# Altium PCB uku207_220_2.PcbDoc (part 2 of 4)
Units mm, origin at the board's own origin, x right, y up, seen from the top; angles counter-clockwise.
Board outline 334.15 x 155.4 mm, 2 copper layers (Top Layer, Bottom Layer); 372 components, 588 nets, 1281 pads, 677 vias.
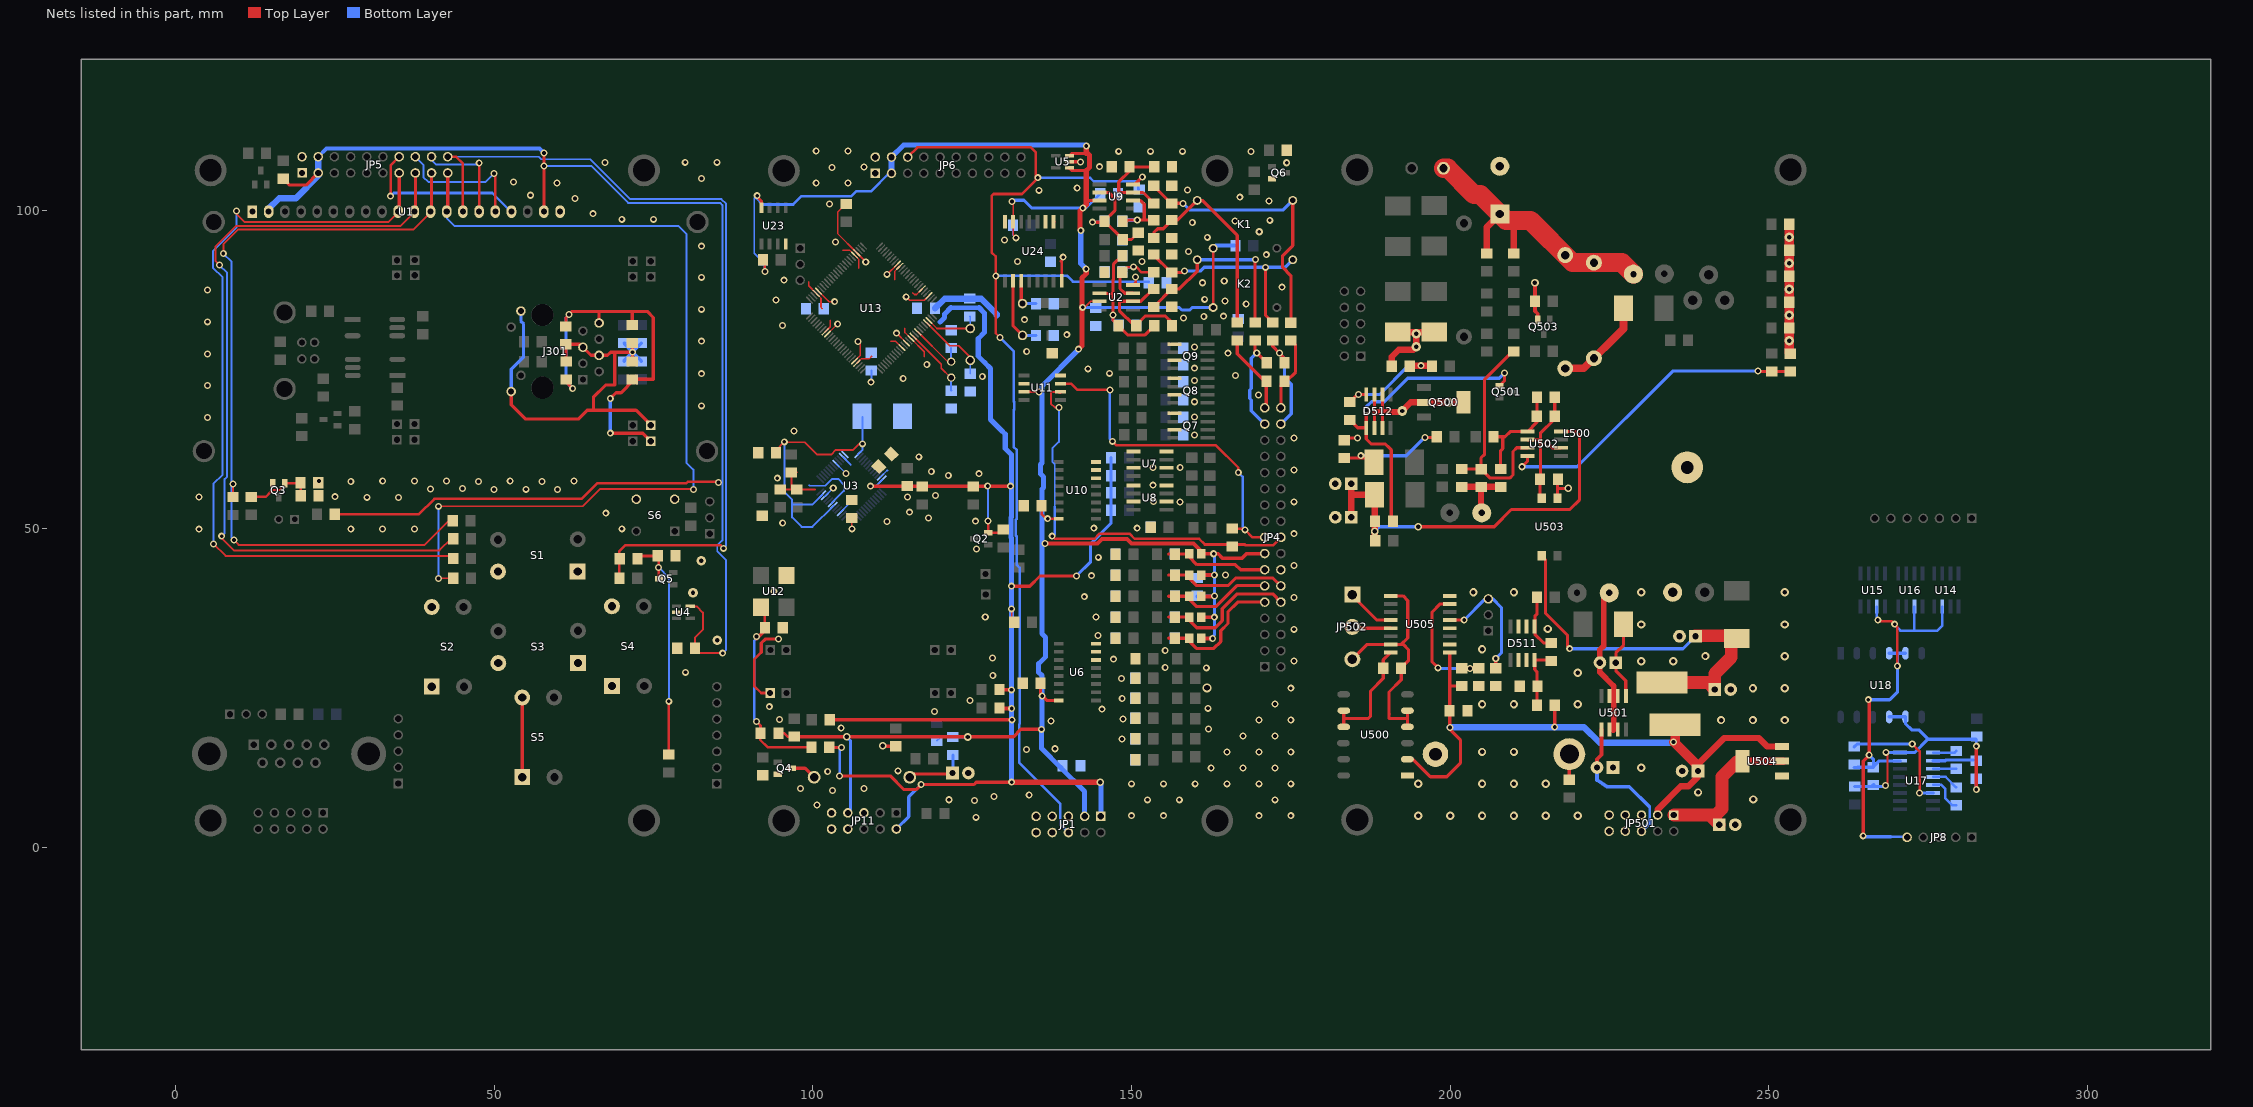
[diagram p2: the nets of this part, all layers, seen from the top]

## Via types
v1: diameter 1.1, hole 0.6, Top Layer to Bottom Layer, 590 vias
v2: diameter 1.3, hole 0.7, Top Layer to Bottom Layer, 36 vias
v3: diameter 1.5, hole 1, Top Layer to Bottom Layer, 18 vias
v4: diameter 1.5, hole 0.7, Top Layer to Bottom Layer, 16 vias
v5: diameter 1.2, hole 0.7, Top Layer to Bottom Layer, 13 vias
v6: diameter 1.4, hole 0.9, Top Layer to Bottom Layer, 3 vias
v7: diameter 1.2, hole 0.6, Top Layer to Bottom Layer, 1 vias

## Nets (pads, with @x,y where several pads share a name; then routed paths per layer and width w, separated by ;. In a path a pad name is that pad's centre, name@x,y a point inside that pad or via, vN(x,y) a via of type N, cw(c..) or ccw(c..) an arc to the next point about the centre after c; other vN are vias at no path point) (continued)
+3V3: C1.1 C30.1 C31.1 C32.1 C58.2 JP1.1 JP11.2 Q2.2 R9.1 R10.2 R20.2 R85.2 R86.2 R92.2 R99.2 R111.1 R112.2 R113.2 R114.2 R115.2 R116.2 R118.1 R120.2 R128.1 R129.1 U3.22 U3.32 U3.48 U13.13 U13.28 U13.42 U13.54 U13.71 U13.84 U13.96 | length 289.8
  Top Layer w0.25: R116.2@94.907,56.188 96.598,56.188 R115.2@97.507,56.188 100.337,56.188 100.35,56.2 ; 97.55,58.869 97.55,58.9 ; U13.71@100.892,87.302 102.393,85.8 102.4,85.8 102.55,85.65 v1(103.426,85.65) ; U13.84@102.306,80.584 103.872,82.15 v1(103.9,82.15) ; R9.1@105.325,101.074 105.275,101.074 105.228,101.027 103.875,99.674 103.875,96.339 U13.54@106.902,93.312 108.3,91.914 v1(108.3,91.9) ; U13.96@106.548,76.341 107.427,77.22 107.427,79.07 v1(107.077,79.42) ; v1(111.65,89.95) 111.672,89.95 U13.42@113.266,91.544 ; v1(113.15,80.7) U13.13@114.68,79.17 ; v1(114.65,86.422) 115.2,85.872 117.493,85.872 U13.28@118.216,86.595 ; v1(131.183,37.459) 131.183,35.728 R10.2@131.596,35.315
  Top Layer w0.3: 96.574,56.164 96.598,56.188 96.624,56.214 R114.2@96.624,58.815
  Top Layer w0.4: v1@127.532,51.213 Q2.2@127.502,49.402 129.322,49.402 R85.2@129.781,49.861
  Top Layer w0.5: R99.2@102.5,15.65 102.55,15.7 102.588,15.7 v1@104.15,15.7 ; R86.2@102.638,20.043 131.243,20.043 v1(131.25,20.05) ; v1(104.2,11.25) 112.15,11.25 114.3,9.1 116.2,9.1 v1(117,9.9) 125.3,9.9 125.65,10.25 v1@131.25,10.25 ; R113.2@129.283,21.755 R113.2@129.293,21.757 ; R112.2@129.333,24.756 v1(131.15,24.75) ; v1(131.182,41.009) 134.032,41.009 135.633,42.61 v1(141.349,42.61)
  Top Layer w0.6: v1(109.05,56.7) 109,56.75 109.05,56.75 v1@109.1,56.75 ; v1(109.05,56.7) 114.794,56.7 117.157,56.7 125.188,56.7 127.431,56.7 v1(131,56.7) v1@131.1,56.7 ; R113.2@129.27,21.899 129.363,21.805 v1@131.233,21.805
  Top Layer w0.8: v1(131.2,10.25) v5(145.1,10.25)
  Bottom Layer w0.25: U3.22@101.872,55.072 v1@103.2,56.4 ; U3.32@103.64,60.27 105.2,58.709 v1(105.2,58.7) ; v1(109.05,56.7) 109.864,56.7 U3.48@110.958,57.795
  Bottom Layer w0.3: v1(127.431,56.713) 127.481,56.663 v1(127.482,51.263)
  Bottom Layer w0.4: v1@104.15,15.7 104.2,15.65 v1(104.2,11.25)
  Bottom Layer w0.5: JP11.2@113.1,2.91 115.05,4.86 115.05,7.95 v1(117,9.9) ; v1(141.349,42.61) 143.586,44.847 143.586,47.662 146.788,50.864 R111.1@146.788,52.957 R118.1@146.788,55.657 R129.1@146.788,58.357 R128.1@146.788,61.157 ; v1@141.35,42.611 v1@141.35,42.775
  Bottom Layer w0.7: 121.679,84.72 126.08,84.72
  Bottom Layer w0.8: 119.979,82.45 120.679,83.15 120.679,83.72 121.679,84.72 ; 126.08,84.72 126.95,83.851 126.95,80.85 125.95,79.85 125.95,77.1 126.981,76.069 ; 126.981,76.068 127.881,75.168 127.881,67.168 129.533,65.517 ; 129.531,65.515 130.182,64.865 130.182,62.615 131.132,61.664 ; 131.04,61.76 131.134,61.666 131.2,61.6 131.2,51.873 131.09,51.763 131.09,49.85 131.09,48.637 131.2,48.527 v1(131.2,10.25) ; v5(145.1,10.25) 145.187,10.163 JP1.1@145.187,4.901
  other v1: 104.476,15.704 131.2,21.8 103.2,56.4
+5V: C17.2 C19.2 C54.2 C55.2 C57.2 C60.2 D5.2 JP1.3 JP4.15 JP6.3 JP6.4 JP11.7 K1.4 K2.4 R16.2 R18.2 R46.2 R53.2 R56.2 R67.2 R73.2 R87.2 R95.2 R96.1 R97.2 R98.2 U2.7 U5.1 U5.3 U6.16 U9.7 U10.16 U11.3 U23.8 U24.15 | length 387.4
  Top Layer w0.25: v1(131.25,101.376) 131.425,101.2 U24.15@131.425,98.175 131.425,96.132 v1(131.883,95.674) ; U24.15@131.4,98.175 U24.15@131.4,98.7
  Top Layer w0.3: v1@142.65,84.75 143.615,85.715 U2.7@145,85.715
  Top Layer w0.4: R95.2@91.65,92.4 92.003,92.047 92.45,91.6 v1@92.45,90.65 ; R98.2@94.588,17.943 95.507,17.943 96.05,17.4 R87.2@97.05,17.4 ; U11.3@133.15,71.515 135.485,71.515 v1(135.5,71.5) ; C54.2@135.934,53.764 135.934,53.667 135.934,52.263 136.597,51.6 v1@137.15,51.6 ; v1@137.155,51.605 U10.16@138.575,51.605 ; K1.4@162.806,94.04 K2.4@162.806,84.74 162.806,84.694 K2.4@162.85,84.65
  Top Layer w0.5: v1@91.123,102.226 91.173,102.176 91.945,101.404 U23.8@91.945,100.4 ; R87.2@97.05,17.4 97.094,17.4 131.5,17.4 132.65,18.55 v1(135.9,18.55) ; C19.2@135.737,25.753 135.737,24.054 136.692,23.098 U6.16@138.58,23.098 ; U5.1@140.025,106.65 140.2,106.65 140.229,106.621 140.6,106.25 142.7,106.25 ; U5.3@140.025,108.55 U5.3@140.25,108.55 ; U5.3@140.254,108.554 140.6,108.9 142.9,108.9 ; 142.9,101.518 U9.7@145.011,101.518
  Top Layer w0.6: v1(136.45,47.7) 144.669,47.7 145.369,48.4 149.281,48.4 149.981,47.7 159.75,47.7 161.151,46.299 161.35,46.1 161.4,46.1 v1(162.9,46.1) 163.6,46.1 164.3,45.4 167.35,45.4 168.05,46.1 170.9,46.1 JP4.15@170.95,46.1 ; R53.2@161.388,36.143 v1(162.994,36.143) ; R67.2@161.388,42.743 v1(162.994,42.743) ; R56.2@161.4,39.4 162.95,39.4 v1(163,39.45) ; R46.2@161.45,32.8 v1@162.45,32.8
  Top Layer w0.8: v1(141.7,78.2) 142.2,78.7 142.2,89.35 142.9,90.05 v1@142.9,90.773 ; v1(142.036,96.824) 141.936,96.924 141.936,99.875 142.9,100.84 142.9,106.191 143.385,106.676 143.385,108.676 142.9,109.161 ; 142.9,108.9 v1(142.9,110.1)
  Bottom Layer w0.3: v1@91.123,102.226 90.8,101.903 90.8,93.25 92.016,92.034 92.4,91.65 92.4,90.65 v1@92.45,90.65 ; R18.2@119.457,16.758 120.041,17.342 R16.2@121.974,17.342 ; R97.2@131.396,97.618 131.396,96.161 v1(131.883,95.674) ; v1(162.9,46.1) v1@163,46 ; v1(162.994,36.143) v1@163,36.15
  Bottom Layer w0.4: v1@91.073,102.226 91.123,102.226 91.123,101.876 92.099,100.9 96.9,100.9 98.2,102.2 106.05,102.2 106.8,102.95 109.1,102.95 111.95,105.8 JP6.3@112.34,105.8 ; v1@135.95,47.7 v1(136.45,47.7) ; 135.95,51.6 v1(136.85,51.6) ; v1(142.35,100.35) 142.861,100.35 C57.2@144.987,102.476
  Bottom Layer w0.5: v5(105.297,17.4) 105.897,16.8 105.897,5.867 JP11.7@105.48,5.45 ; R16.2@121.974,17.342 124.292,17.342 v5(124.3,17.35) ; v1(131.25,101.376) 131.45,101.576 133.134,101.576 134.359,100.35 v1(142.35,100.35) ; v1@142.65,84.74 144.403,84.74 157.499,84.74 157.898,84.34 159.129,84.34 159.528,84.74 K2.4@162.806,84.74 ; v1@162.45,32.8 162.6,32.95 163,33.35 163,36.143 163,36.15 v1(163,39.45) 163,42.743 v1@163,46
  Bottom Layer w0.6: C17.2@160.34,39.41 v1(163,39.45) ; K1.4@162.806,94.04 163.216,94.45 D5.2@166.3,94.45 D5.2@166.35,94.45
  Bottom Layer w0.8: JP6.4@112.34,108.34 114.25,110.25 142.75,110.25 v1(142.9,110.1) ; v1(135.9,18.55) 135.9,15.538 138.907,12.531 142.647,8.792 JP1.3@142.647,4.901 ; v1@135.95,18.55 135.95,26.991 135.434,27.507 135.434,28.841 136.534,29.942 136.534,32.974 135.95,33.558 135.95,42 135.95,56.227 136.214,56.491 136.214,58.138 135.7,58.652 135.7,60.1 135.95,60.35 135.95,66.85 135.95,72.4 v1@141.7,78.15 ; v1(142.036,96.824) 142.036,91.623 v1(142.886,90.773)
  Bottom Layer w1: JP6.3@112.34,105.8 JP6.4@112.34,108.34
  other v1: 135.984,23.756 162.741,32.808 142.336,84.771 92.473,90.373 91.273,102.276
+5V_IZ: 
+IAKB1: JP4.32 R123.1 R124.2 | length 17
  Top Layer w0.5: R124.2@172.194,79.562 172.15,79.6 172.15,79.562 172.15,78.65 v1(173.2,77.6) 174,76.8 174,76.057 R123.1@174.013,76.057
  Bottom Layer w0.5: v1(173.2,77.6) 174,76.8 174,73.75 175.05,72.7 175.05,68.06 JP4.32@173.44,66.45
+IAKB2: JP4.34 R63.1 R64.2 | length 12.1
  Top Layer w0.5: JP4.34@173.44,68.99 173.44,72.59 R63.1@174,73.15 174.3,73.15 175.75,74.6 175.75,78.85 175.025,79.575 175,79.6 R64.2@175,79.55
-5V: C18.2 C56.2 JP1.6 JP6.6 U2.4 U9.4 | length 185.2
  Top Layer w0.4: JP6.6@114.88,108.34 116.39,109.85 134.2,109.85 135,109.05 135,104.75 132.8,102.55 128.35,102.55 128.05,102.25 128.05,93.4 128.7,92.75 128.7,80.7 v1(129.35,80.05) ; v1(150.638,89.523) 150.638,88.693 U2.4@150.2,88.255 U2.4@150.705,88.255 ; 151.05,104.55 151.1,104.55
  Top Layer w0.5: U9.4@150.211,104.058 150.519,104.058 v1(151.688,105.227)
  Bottom Layer w0.4: v1(128.7,89.7) 139.9,89.7 ; v1(129.35,80.05) 131.5,77.9 131.5,70.018 131.633,69.885 131.633,68.767 131.5,68.634 131.5,62.85 132,62.35 132,51.57 131.87,51.44 131.87,48.96 132,48.83 132,44.35 132.45,43.9 132.45,19.4 132.35,19.3 132.35,13.352 138.85,6.852 138.85,3.618 JP1.6@140.107,2.361 ; v1(135.3,105.1) 143.5,105.1 144.05,104.55 151.038,104.55 ; 139.9,89.65 139.95,89.65 140.8,88.8 150.638,88.8 152.65,88.8 C18.2@152.7,88.75 ; 151.1,104.55 151.05,104.55 ; C56.2@151.15,103.25 151.05,103.35 151.05,104.55 ; v1(151.688,105.227) 151.038,104.576 151.038,104.55 ; 151.038,104.55 151.05,104.55
-5V_IZ: 
-IAKB1: JP4.31 R13.2 R123.2 | length 16.9
  Top Layer w0.5: R13.2@169.393,79.562 169.393,77.876 v1(169.65,77.619) R123.2@171.212,76.057
  Bottom Layer w0.5: v1(169.65,77.619) 168.8,76.769 168.8,72.026 168.542,71.768 168.542,70.475 168.8,70.218 168.8,68.55 JP4.31@170.9,66.45
-IAKB2: JP4.33 R60.2 R63.2 | length 12.6
  Top Layer w0.5: R60.2@166.594,79.562 166.594,77.457 171.05,73 171.15,72.9 171.15,69.24 JP4.33@170.9,68.99
-UOUT: 
A: JP502.1 U505.12 | length 7.8
  Top Layer w0.5: JP502.1@184.65,39.7 184.65,39.55 188.515,35.685 U505.12@190.672,35.685
B: JP502.2 U505.13 | length 6.1
  Top Layer w0.5: JP502.2@184.65,34.62 184.855,34.415 U505.13@190.672,34.415
BAT: 
CANH: JP4.17 R17.2 U11.7 | length 53.6
  Top Layer w0.4: U11.7@138.85,72.785 140.515,72.785 141.5,71.8 v1(146.6,71.8) ; v1(147,63.75) 147.6,63.15 163.207,63.15 166.75,59.607 v1(166.75,58.85) ; R17.2@165.892,50.013 167.642,50.013 v1(167.792,49.863) 168.985,48.67 170.885,48.67 JP4.17@170.893,48.663
  Bottom Layer w0.4: v1(146.6,71.8) 146.55,71.75 146.55,64.2 v1(147,63.75) ; v1(166.75,58.85) 167.45,58.15 167.45,50.205 v1(167.792,49.863)
CANL: JP4.18 R17.1 U11.6 | length 63.7
  Top Layer w0.25: U11.6@138.65,71.5 U11.6@138.85,71.5
  Top Layer w0.3: v1(138.6,69.05) 137.95,69.05 137.35,69.65 137.35,71.35 137.5,71.5 U11.6@138.75,71.5
  Top Layer w0.4: v1(137.55,48.85) 137.95,48.45 144.2,48.45 145,49.25 149.7,49.25 150.5,48.45 160.6,48.45 161.5,47.55 165.797,47.55 167.75,47.55 167.9,47.4 172.17,47.4 JP4.18@173.44,48.67 JP4.18@173.42,48.67
  Top Layer w0.6: U11.6@138.65,71.5 U11.6@138.8,71.5
  Bottom Layer w0.3: 137.95,53.5 137.95,60.15 137.6,60.5 137.6,62.666 138.6,63.666 v1(138.6,69.05)
  Bottom Layer w0.4: v1(137.55,48.85) 137.65,48.85 137.95,49.15 137.95,53.5
DB0: JP5.13 R5.2 U1.10 | length 126.9
  Top Layer w0.3: v1(5.95,47.65) 7.85,45.75 43.169,45.75 R5.2@43.562,45.357 ; v1(9.55,99.9) 9.55,99.45 10.85,98.15 33.402,98.15 U1.10@34.933,99.681 ; R5.2@43.425,45.376 R5.2@43.45,45.35
  Top Layer w0.5: U1.10@34.933,99.681 34.933,99.683 35.09,99.84 JP5.13@35.09,105.85
  Bottom Layer w0.3: v1(5.95,47.65) 5.95,57.05 7.4,58.5 7.4,89.45 5.85,91 5.85,93.55 9.55,97.25 v1(9.55,99.9)
DB1: JP5.15 R3.2 U1.11 | length 124.4
  Top Layer w0.3: v1(6.9,91.4) 6.25,92.05 6.25,94.25 9.55,97.55 35.342,97.55 U1.11@37.473,99.681 ; v1(7.25,48.85) 7.25,48.5 9.138,46.612 41.41,46.612 43.361,48.562 R3.2@43.511,48.562
  Top Layer w0.5: U1.11@37.473,99.681 37.63,99.838 JP5.15@37.63,105.85
  Bottom Layer w0.3: v1(6.9,91.4) 8.1,90.2 8.1,58.2 7.7,57.8 7.7,49.3 v1(7.25,48.85)
DB2: D1.1 JP5.17 R7.2 U1.12 | length 126.6
  Top Layer w0.3: v1(7.5,93.2) 7.5,94.65 9.8,96.95 37.282,96.95 U1.12@40.013,99.681 ; v1(9,57.05) 9.017,57.033 D1.1@9.017,55.003 ; v1(9.15,48.25) 9.9,47.5 39.098,47.5 42.848,51.25 R7.2@43.5,51.25
  Top Layer w0.5: U1.12@40.013,99.681 40.17,99.838 JP5.17@40.17,105.85
  Bottom Layer w0.3: v1(7.5,93.2) 8.8,91.9 8.8,48.6 v1(9.15,48.25) ; v1@8.8,57.35 9,57.15 v1(9,57.05)
DB3: JP5.19 R4.2 U1.13 | length 141.2
  Top Layer w0.3: v1(41.25,42.2) 41.307,42.257 R4.2@43.562,42.257 ; v1(41.25,53.55) 63.9,53.55 66.6,56.25 v1@81.2,56.25
  Top Layer w0.5: U1.13@42.553,99.681 42.71,99.838 JP5.19@42.71,105.85
  Bottom Layer w0.3: v1(41.25,42.2) v1(41.25,53.55) ; U1.13@42.553,99.781 42.553,98.747 43.8,97.5 78.95,97.5 80.15,96.3 80.15,60.4 81.25,59.3 v1(81.25,56.2) ; v1@81.3,56.15 v1@81.3,56.2
DB4: JP5.20 R6.2 R19.1 U1.14 | length 132.6
  Top Layer w0.4: JP5.20@42.69,108.39 JP5.20@42.71,108.39 ; JP5.20@42.7,108.38 JP5.20@42.71,108.39 ; U1.14@45.093,99.681 45.093,107.307 44.01,108.39 JP5.20@42.71,108.39 ; R6.2@69.6,42.25 69.6,46.45 70.55,47.4 85.55,47.4 v1(86,46.95)
  Bottom Layer w0.3: JP5.20@42.71,108.39 57.01,108.39 57.4,108 65.1,108 71.35,101.75 85.65,101.75 86.4,101 86.4,47.35 v1(86,46.95)
DB5: JP5.18 U1.15 | length 16.2
  Top Layer w0.4: U1.15@47.633,99.681 47.633,107.383 v1(47.65,107.4)
  Bottom Layer w0.25: v1@47.45,107.2 v1(47.65,107.4)
  Bottom Layer w0.3: JP5.18@40.1,108.4 40.11,108.39 JP5.18@40.17,108.39 40.17,107.88 40.85,107.2 v1@47.45,107.2
DB6: JP5.16 U1.16 | length 21.9
  Top Layer w0.4: v1(49.95,105.75) 50.173,105.527 50.173,99.681 50.154,99.7 U1.16@50.1,99.7
  Bottom Layer w0.3: JP5.16@37.63,108.39 38.9,107.12 38.9,105.2 39.65,104.45 48.65,104.45 v1(49.95,105.75)
DB7: JP5.14 U1.17 | length 27.2
  Top Layer w0.4: v1(33.75,102.2) 33.75,107.05 JP5.14@35.09,108.39
  Bottom Layer w0.4: v1(33.75,102.2) 34.25,102.7 49.694,102.7 U1.17@52.713,99.681
DT1: JP4.9 R46.1 R47.1 | length 20.9
  Top Layer w0.5: 155.813,32.857 155.828,32.872 155.857,32.843 156.813,32.843 158.588,32.843 158.822,32.609 160.181,31.25 162.933,31.25 163.991,32.308 163.991,34.009 165.142,35.159 165.142,37.009 166.642,38.51 JP4.9@170.9,38.51
DT2: JP4.10 R53.1 R54.1 | length 22.1
  Top Layer w0.5: 155.813,36.157 R54.1@156.813,36.157 158.575,36.157 158.588,36.143 158.822,35.909 160.231,34.5 163.132,34.5 164.241,35.609 164.241,37.459 166.582,39.8 172.15,39.8 JP4.10@173.44,38.51
DT3: JP4.11 R56.1 R58.1 | length 17.2
  Top Layer w0.5: 155.813,39.457 155.813,39.443 156.813,39.443 158.588,39.443 158.822,39.209 160.231,37.8 163.232,37.8 166.532,41.1 170.9,41.1 JP4.11@170.9,41.05
DT4: JP4.12 R67.1 R68.1 | length 19.3
  Top Layer w0.5: 155.813,42.757 155.826,42.743 156.813,42.743 158.588,42.743 158.842,42.489 160.231,41.1 165.131,41.1 166.331,42.3 172.19,42.3 JP4.12@173.44,41.05
DT5: JP4.13 R73.1 R75.1 | length 16.1
  Top Layer w0.5: 155.813,46.057 155.819,46.05 156.813,46.05 158.6,46.05 158.801,45.849 158.971,45.679 160.25,44.4 166.3,44.4 167.11,43.59 JP4.13@170.9,43.59
GND: C1.2 C3.2 C4.2 C5.2 C6.2 C7.2 C8.2 C9.2 C10.2 C12.1 C13.2 C14.1 C15.1 C16.1 C17.1 C18.1 C19.1 C20.1 C21.2 C23.2 C24.2 C25.1 C26.2 C28.2 C29.1 C30.2 C31.2 C32.2 C33.2 C34.2 C35.1 C36.1 C50.1 C51.1 C52.1 C53.1 C54.1 C55.1 C56.1 C57.1 C58.1 C60.1 C62.1 C63.1 C64.1 C65.1 C66.2 D2.1 D6.1 D7.1 D8.1 D9.1 D10.1 D11.1 JP1.5 JP1.7 JP1.8 JP1.9 JP1.10 JP4.14 JP6.1 JP6.2 JP11.5 JP11.8 JP11.9 JP11.10 Q4.2 Q6.2 Q7.1 Q7.3 Q8.1 Q8.3 Q9.1 Q9.3 R23.1 R24.2 R26.2 R28.2 R32.2 R34.1 R35.2 R39.1 R40.2 R48.1 R55.1 R59.1 R69.1 R70.1 R74.1 R76.1 R77.1 R78.1 R81.1 R82.1 R117.1 R127.1 U3.15 U3.19 U3.35 U3.36 U3.47 U5.2 U6.6 U6.7 U6.8 U7.2 U7.4 U7.5 U7.7 U8.2 U8.4 U8.5 U8.7 U10.6 U10.7 U10.8 U11.2 U11.8 U12.2 U13.11 U13.15 U13.31 U13.41 U13.55 U13.72 U13.83 U13.97 U23.4 U24.8 U24.10 U24.11 U24.16 X5.1 | length 78
  Top Layer w0.25: 99.35,88.771 99.35,88.136 U13.72@100.538,86.948 101.274,86.212 101.274,84.75 101.474,84.55 ; U13.83@101.952,80.938 102.725,81.71 102.725,82.75 ; 104.725,93.75 105.757,93.75 U13.55@106.549,92.958 107.176,92.331 107.176,90.872 ; C30.2@106.094,51.712 106.127,51.679 v1(106.127,50.013) ; U13.97@106.902,75.988 107.632,76.718 108.876,76.718 109.25,77.092 109.25,77.118 ; 112.25,79.419 113.017,79.419 U13.11@113.973,78.463 ; 112.827,89.121 112.827,90.398 U13.41@113.62,91.191 ; 114.45,81.469 114.45,80.815 115.242,80.022 U13.15@115.387,79.877 117.478,77.786 117.478,77.018 ; 115.65,87.072 115.95,86.772 116.272,86.772 U13.31@117.155,87.655
  Top Layer w0.4: 91.897,30.9 91.897,30.597 90.8,29.5 90.8,25.35 91.9,24.25 X5.1@93.3,24.25 ; C30.2@106.075,51.112 106.094,51.13 C30.2@106.094,51.712 ; 138.934,92.022 138.984,92.022 139.045,91.961 U24.8@139.045,88.925 U24.8@139.045,88.871
  Top Layer w0.5: 91.897,30.65 91.897,32.1 92.505,32.708 v1(94.624,32.708) ; v5(110.95,15.95) 111.008,15.892 C29.1@113.007,15.892 ; U24.10@137.775,98.175 U24.10@137.8,98.2 ; U5.2@140.025,107.6 U5.2@140.259,107.6 v1@141.45,107.6
  Bottom Layer w0.25: 99.476,56.779 102.041,56.779 ; U3.19@102.933,54.012 U3.19@102.99,54.069 ; U3.15@104.347,52.597 105.525,53.776 105.525,54.113 ; U3.35@104.7,61.33 105.95,60.081 105.95,60.014 ; U3.47@110.605,58.148 111.62,59.164 111.727,59.164
  Bottom Layer w0.3: 99.424,56.85 99.46,56.813 ; 102.024,56.813 103.061,57.85 103.963,57.85 104.875,56.938 104.875,55.954 U3.19@102.99,54.069 ; v1(109.127,73.018) 109.183,73.074 C32.2@109.183,74.831
  Bottom Layer w1: C58.1@119.162,84.593 120.689,86.121 124.647,86.121 126.41,86.121 128.831,83.699 128.831,83.52
  other v1: 125.58,4.75 149.997,5 154.997,5 169.997,5 174.997,5 100.65,6.701 125.38,7.401 121.35,7.501 152.497,7.5 157.497,7.5 172.497,7.5 128.431,8.001 133.95,8.25 103.097,8.95 98.05,9.251 108.026,9.25 149.997,10 154.997,10 159.997,10 164.997,10 169.997,10 174.997,10 102.324,11.95 113.377,12.05 162.497,12.5 167.497,12.5 172.497,12.5 164.997,15 169.997,15 174.997,15 133.532,15.403 137.983,15.503 148.487,17.05 167.497,17.5 172.497,17.5 162.09,18.604 104.45,18.75 137.383,19.85 169.997,20 174.997,20 94.75,20.104 148.687,20.15 119.079,21.354 145.385,21.704 161.99,21.854 93.172,22.104 172.497,22.5 124.65,23.056 148.537,23.406 174.997,25 148.437,26.55 128.231,27.006 161.739,28.206 155.289,28.257 175.493,29.25 147.186,29.556 128.181,29.75 155.289,30.908 144.75,33.258 175.493,34.25 127.05,36.158 144.45,36.158 175.493,39.25 142.585,39.359 93.872,40.159 143.736,42.661 164.75,42.761 175.493,44.25 144.786,45.55 125.68,46.861 175.493,49.25 144.085,50.112 150.887,50.112 95.273,50.95 111.628,51.15 125.53,51.212 118.128,51.712 115.15,52.613 157.59,54.214 153.439,54.264 175.493,54.25 114.85,55.013 119.229,55.25 153.389,56.85 94.424,57.95 121.25,58.364 126.05,58.664 118.579,59.014 175.493,59.264 153.389,59.615 157.64,59.615 116.628,61.314 175.493,64.25 159.9,64.715 97.05,65.366 159.9,67.55 159.9,69.95 169.943,71.018 159.9,73.267 114.177,73.617 126.581,73.918 166.291,74.05 146.55,74.418 143.15,75.118 159.9,75.218 117.878,75.818 165.15,77.57 133.55,77.819 159.9,78.55 139.85,80.47 95.25,81.92 133.232,82.82 158.139,83.07 161.339,83.35 164.45,83.37 167.991,85.27 164.69,85.75 94.222,85.921 161.489,86.021 173.592,87.921 161.139,88.621 164.55,88.871 95.473,89.021 132.133,91.95 151.638,91.95 139.285,92.623 171.142,93.022 158.95,93.522 103.55,95.024 130.083,95.35 161.89,95.75 170.042,96.623 159.539,98.074 166.241,98.324 171.692,98.424 102.625,100.974 171.592,101.424 166.991,102.05 135.483,103.125 158.789,103.175 141.484,103.475 100.524,104.25 105.525,104.25 103.025,106.726 108.026,106.776 144.987,106.827 174.35,107.45 141.986,107.577 168.75,109.228 147.986,109.25 152.987,109.25 157.989,109.25 100.524,109.276 105.525,109.276
  other v6: 161.839,25.055
NetA1_1: A1.1 Q4.3 | length 4.1
  Top Layer w0.5: Q4.3@96.698,12.448 98.787,12.448 A1.1@100.198,11.038
NetA1_2: A1.2 C3.1 R16.1 | length 9.9
  Top Layer w0.5: A1.2@115.197,11.038 115.71,11.55 121.767,11.55 C3.1@121.909,11.692
  Bottom Layer w0.5: C3.1@121.909,11.692 121.974,11.757 R16.1@121.974,14.542
NetBT1_1: 
NetBT1_2: 
NetBT2_1: 
NetBT2_2: 
NetBT500_1: BT500.1 D500.1 | length 4
  Top Layer w0.5: D500.1@218.651,10.647 218.695,10.691 BT500.1@218.695,14.659
NetBT500_2: BT500.2 C27.2 C502.1 C506.1 C507.1 C508.2 C509.2 C517.2 C518.1 C519.1 D504.2 D511.2 D511.3 D511.6 D511.7 JP501.5 JP501.7 JP501.8 JP501.9 JP501.10 L500.7 R505.2 U500.1 U501.5 U504.1 U505.2 U505.4 U505.8 | length 12.5
  Top Layer w0.5: D504.2@227.216,35.053 227.216,31.766 225.996,30.546 225.996,27.754 227.562,26.188 U501.5@227.562,23.755
  other v2: 194.997,5 199.997,5 204.997,5 209.997,5 214.997,5 219.997,5 247.55,7.55 238.897,8.65 194.997,10 204.997,10 209.997,10 214.997,10 229.997,12.5 204.997,15 209.997,15 242.497,20 247.497,20 252.497,20 204.997,22.5 209.997,22.5 219.997,22.5 247.497,25 252.497,25 220,27.45 230,29.25 234.997,29.25 252.497,30 240.05,30.05 204.997,31.1 215.297,34.3 229.997,35 252.497,35 203.65,40.05 210,40.05 230,40.05 252.5,40.05
NetC2_1: C2.1 C22.2 C37.1 JP5.1 JP5.2 Q3.2 R11.2 S1.1 S2.1 S3.1 S4.1 S5.1 S6.2 U1.1 U1.20 U4.2 | length 12.5
  Top Layer w0.6: S5.1@54.4,11.05 S5.1@54.4,23.55
  Bottom Layer w0.6: S5.1@54.4,23.55 S5.1@54.4,23.555
  other v1: 79.997,27.5 3.7,49.95 27.497,50 32.497,50 37.497,50 70.018,50.013 67.517,52.463 35.009,54.95 30.05,54.964 3.697,55 25.006,55.05 49.95,56.164 59.95,56.164 55.014,56.214 40.01,56.25 45.011,56.314 27.507,57.45 47.562,57.45 57.514,57.45 22.506,57.514 32.508,57.514 37.509,57.514 42.511,57.514 52.513,57.514 62.516,57.514 4.997,67.5 82.521,69.317 4.997,72.5 82.521,74.35 5,77.45 82.521,79.45 4.997,82.5 82.521,84.45 4.997,87.5 82.55,89.473 82.521,94.35 70.018,98.575 75.019,98.575 65.517,99.45 62.666,101.85 55.714,102.35 59.85,104.276 53.05,104.426 82.521,104.976 67.397,107.5 79.97,107.527 84.971,107.527
  other v4: 84.997,32.5 81.197,40 82.497,45
NetC2_2: C2.2 Q3.1 R8.1 R11.1 | length 10.6
  Top Layer w0.3: 15,55.85 15.25,56.1 16.3,56.1 17.144,56.944 Q3.1@17.144,57.155
  Top Layer w0.4: R8.1@11.886,55.009 14.159,55.009 15,55.85 ; Q3.1@17.144,57.155 19.55,57.155 19.641,57.064 R11.1@19.641,55.235
NetC11_1: C11.1 C15.2 R57.2 R62.1 U9.6 | length 16.8
  Top Layer w0.4: R62.1@148.613,95.407 148.643,95.407 148.657,95.407 149.97,95.407 C15.2@150.988,96.424
  Top Layer w0.5: 144.5,98.15 144.5,98.125 144.5,98.1 145.556,98.1 R57.2@145.688,98.232 ; U9.6@145,102.8 145.011,102.8 146.4,102.8 147.4,101.8 147.4,99.944 R57.2@145.762,98.307 R57.2@145.688,98.232 ; R62.1@148.75,95.5 148.657,95.407 148.65,95.4 148.643,95.407 148.628,95.422 145.818,98.232 145.762,98.232 R57.2@145.688,98.232 ; R62.1@149.093,95.407 R62.1@149.113,95.407
  Bottom Layer w0.5: 144.5,98.1 145.7,98.1 C11.1@145.8,98.2
  other v1: 143.886,98.125
NetC11_2: C11.2 R57.1 R61.2 U9.2 | length 11
  Top Layer w0.5: R57.1@149.095,98.14 149.406,98.45 v1(150.9,98.45) 152,98.45 ; U9.2@150.211,101.518 151.432,101.518 152,100.95 152,98.45 ; R61.2@153.507,98.438 153.5,98.45 152,98.45
  Bottom Layer w0.6: C11.2@149.103,98.147 149.406,98.45 v1(150.9,98.45) v1@150.95,98.45
NetC12_2: C12.2 K1.3 R60.1 R61.1 | length 32
  Top Layer w0.5: R61.1@153.507,95.638 153.507,96.507 154.1,97.1 155,97.1 156.325,98.425 156.4,98.5 157.266,98.5 K1.3@160.306,101.54 161.111,101.54 166.594,96.057 R60.1@166.594,82.362
NetC14_2: C14.2 K1.1 R64.1 R65.1 | length 44.4
  Top Layer w0.5: R65.1@153.5,103.85 153.5,103.8 156.2,101.1 156.303,101.1 158.05,101.1 v1(158.1,101.05) ; R64.1@175,82.35 175,89.75 173.7,91.05 173.7,92.85 175.306,94.456 K1.1@175.306,101.54
  Bottom Layer w0.5: v1(158.1,101.05) 159.1,100.05 173.816,100.05 K1.1@175.306,101.54
NetC21_1: C21.1 C34.1 U3.18 U3.23 U3.37 | length 48.4
  Top Layer w0.3: C21.1@94.224,61.916 94.224,61.966 94.224,62.366 v1(95.524,63.666) ; v1@95.55,63.25 95.745,63.445 95.9,63.6 98.75,63.6 100.7,61.65 102.85,61.65 103.6,62.4 106.3,62.4 107.25,63.35 v1(107.8,63.35)
  Bottom Layer w0.3: v1@95.55,63.25 95.55,55.8 96.75,54.6 96.75,53.8 ; U3.23@101.518,55.426 99.892,53.8 96.75,53.8 ; U3.18@103.286,53.658 99.928,50.3 98.25,50.3 96.75,51.8 96.75,53.8 ; U3.37@107.069,61.684 107.8,62.415 v1(107.8,63.35) 107.8,67.55 C34.1@107.75,67.6
NetC22_1: C22.1 JP5.3 JP5.4 R2.2 R21.2 U1.2 U1.19 U4.5 | length 243.1
  Top Layer w0.3: U4.5@80.75,37.9 80.775,37.875 U4.5@80.775,37.85 81.75,37.85 82.75,36.85 82.75,34.2 81.5,32.95 81.5,31.307 81.5,31.3 81.503,31.297 82.3,30.5 v1(85.85,30.5)
  Top Layer w0.4: R21.2@24.95,52.35 25.016,52.284 25.038,52.262 38.159,52.262 40.61,54.714 63.716,54.714 66.152,57.15 80.135,57.15 80.4,57.414 v1@85.086,57.414 ; v1@57.8,106.65 v1(57.8,106.95)
  Top Layer w0.5: R2.2@16.897,104.95 17.897,103.95 20.49,103.95 JP5.3@22.39,105.85 ; U1.19@57.793,99.781 57.8,99.788 v1@57.8,106.65 ; v1(57.8,106.95) v1(57.8,109)
  Bottom Layer w0.3: v1(57.8,106.95) 65.2,106.95 71,101.15 85.45,101.15 85.8,100.8 85.8,48.2 84.997,47.397 84.997,46.5 86.4,45.097 86.4,31.05 v1(85.85,30.5)
  Bottom Layer w0.6: JP5.4@22.39,108.39 23.7,109.7 57.1,109.7 v1(57.8,109)
  Bottom Layer w1: U1.2@14.613,99.681 14.613,100.263 16.25,101.9 18.9,101.9 22.39,105.39 JP5.3@22.39,105.85 JP5.4@22.39,108.39
  other v1: 85.2,57.3
NetC23_1: C23.1 R65.2 R69.2 U9.3 | length 14.7
  Top Layer w0.5: R65.2@153.5,101.05 153.5,101.1 151.813,102.788 U9.3@150.211,102.788 148.213,102.788 148,103 148,104.45 149.685,106.134 C23.1@149.685,106.824 149.708,106.8 153.5,106.8 R69.2@153.563,106.807
NetC27_1: C27.1 C502.2 JP501.3 L501.1 R507.1 R531.1 U500.2 U504.3 U505.1 | length 104.9
  Top Layer w0.5: U500.2@193.29,13.857 194.143,13.857 196.9,11.1 199.45,11.1 201.6,13.25 201.6,16.9 199.922,18.578 U505.1@199.922,30.605 ; 199.922,25.35 199.935,25.337 R531.1@201.807,25.337 ; v1(216.397,18.9) 216.405,18.908 R507.1@216.405,22.307
  Top Layer w1: JP501.3@232.569,5.101 232.569,5.972 236.197,9.6 237.4,9.6 238.886,11.086 C27.1@238.885,12.008 ; C27.1@238.608,12.01 C27.1@238.81,12.01 ; 238.81,13.013 242.997,17.2 248.4,17.2 249.747,15.853 U504.3@252.063,15.853
  Top Layer w1.5: v1(235.05,16.55) v1@235.286,16.55 ; L501.1@235.286,19.285 235.286,16.428 C27.1@238.81,12.903 ; C27.1@238.81,12.01 238.81,13.013
  Bottom Layer w1: v1(199.947,18.85) 199.95,18.85 200,18.9 220.997,18.9 223.447,16.45 234.95,16.45 v1(235.05,16.55)
NetC33_1: C33.1 R98.1 R99.1 U12.4 | length 31
  Top Layer w0.4: v1(91.172,19.754) 91.788,19.138 R98.1@91.788,17.943 ; R98.1@91.75,18 91.75,17.943 91.75,16.9 92.907,15.743 R99.1@99.788,15.743 ; U12.4@91.8,37.85 91.9,37.75 92.45,37.2 92.45,35.608 ; C33.1@92.45,34.45 92.45,34.493 92.45,35.608 ; 92.472,35.608 92.45,35.608
  Top Layer w0.6: v1@91.173,32.758 91.198,32.783 92.45,34.035 92.45,34.493 C33.1@92.45,34.559
  Bottom Layer w0.4: v1(91.172,19.754) 90.822,20.104 90.822,32.457 v1@91.173,32.808
  other v1: 91.15,33.1
NetC35_2: C35.2 U13.16 Y1.2 | length 11.1
  Top Layer w0.25: U13.16@115.741,80.231 120.15,75.821 120.15,75.2 121.601,73.749 121.7,73.749 Y1.2@121.705,73.749
  Bottom Layer w0.3: Y1.2@121.705,73.749 121.705,73.747 121.705,71.726 C35.2@121.744,71.688 C35.2@121.75,71.694
NetC36_2: C36.2 U13.18 Y1.1 | length 9.3
  Top Layer w0.25: U13.18@116.448,80.938 121.137,76.249 121.7,76.249 Y1.1@121.705,76.249
  Bottom Layer w0.3: Y1.1@121.705,76.249 121.705,78.36 C36.2@121.707,78.362
NetC37_2: C37.2 Q5.3 R19.2 R83.2 | length 37
  Top Layer w0.4: R19.2@72.49,45.343 72.897,45.75 75.715,45.75 75.797,45.668 75.797,42.307 Q5.3@75.902,42.202 ; v1(77.4,22.95) 77.407,22.943 R83.2@77.407,14.592
  Bottom Layer w0.3: v1(75.797,43.95) 77.4,42.347 v1(77.4,22.95)
NetC45_1: C45.1 U17.3 | length 3.6
  Bottom Layer w0.3: C45.1@279.395,12.361 C45.1@279.406,12.35
  Bottom Layer w0.4: U17.3@275.792,12.361 C45.1@279.395,12.361
NetC45_2: C45.2 U17.1 | length 3.7
  Bottom Layer w0.4: U17.1@275.792,14.901 279.156,14.901 C45.2@279.406,15.15
NetC46_1: C46.1 U17.2 | length 6.8
  Bottom Layer w0.5: U17.2@275.792,13.631 277.686,13.631 277.803,13.747 282.303,13.747 282.5,13.55 C46.1@282.503,13.547
NetC46_2: C46.2 C47.1 R90.1 R91.2 U17.16 U18.5 | length 44.9
  Top Layer w0.3: v1@268.253,9.697 v1(268.303,9.747) ; v1@268.303,9.497 v1(268.303,9.747) ; v1@268.603,14.947 268.603,14.945 268.603,10.047 v1(268.303,9.747)
  Top Layer w0.4: v1@268.603,14.947 v1@268.653,14.897
  Top Layer w0.5: v1(282.55,9.097) v1(282.55,15.897)
  Bottom Layer w0.4: v1(282.55,15.897) 282.55,16.553 282.557,16.56
  Bottom Layer w0.5: R90.1@263.453,9.597 263.509,9.597 C47.1@266.153,9.597 ; C47.1@266.453,9.797 266.453,9.8 266.453,9.897 266.403,9.847 266.381,9.825 266.253,9.697 C47.1@266.153,9.597 ; v1(268.303,9.747) 268.153,9.597 266.406,9.597 C47.1@266.153,9.597 ; v1@268.603,14.947 268.653,14.897 U17.16@270.553,14.897 ; U18.5@268.879,20.491 268.904,20.516 U18.5@271.429,20.516 271.429,19.468 272.429,18.468 273.529,18.468 274.95,17.047 274.95,16.997 ; U17.16@270.592,14.901 272.853,14.901 274.95,16.997 ; v1(282.55,9.097) 282.55,10.801 C46.2@282.559,10.81 v1@282.559,9.254 ; R91.2@282.55,16.897 282.45,16.997 274.95,16.997
  other v1: 268.371,14.945
NetC47_2: C47.2 C49.2 JP8.5 U14.7 U15.2 U16.2 U17.15 U18.4 | length 79.2
  Top Layer w0.4: v1(267.1,35.697) 267.3,35.497 269.3,35.497 270.15,34.647 v1(270.15,28.497)
  Top Layer w0.5: v1(264.8,1.847) 264.8,13.547 v1(265.75,14.497) 265.75,23.047 v1(265.6,23.197)
  Bottom Layer w0.4: U15.2@266.935,37.797 266.935,35.862 v1(267.1,35.697) ; 269.15,1.697 271.593,1.697 JP8.5@271.69,1.6 ; v1(269.75,35.047) 269.75,34.947 270.65,34.047 276.45,34.047 277.215,34.812 U14.7@277.215,37.797 ; U16.2@272.835,37.797 272.835,34.112 272.9,34.047
  Bottom Layer w0.5: C49.2@263.399,12.547 263.903,12.547 263.953,12.597 266.303,12.597 267.303,13.597 270.592,13.597 U17.15@270.653,13.597 ; v1(264.8,1.847) 264.95,1.697 269.15,1.697 ; v1(265.6,23.197) 268.95,23.197 270.2,24.447 270.2,30.497 ; v1(265.75,14.497) 266.406,13.842 C47.2@266.406,12.6 ; U18.4@268.879,30.491 270.194,30.491 270.2,30.497 ; U18.4@271.429,30.491 270.206,30.491 270.2,30.497
NetC48_1: C48.1 U17.4 | length 4.3
  Bottom Layer w0.4: U17.4@275.792,11.091 277.753,11.091 C48.1@279.399,9.445
NetC48_2: C48.2 U17.5 | length 5.8
  Bottom Layer w0.4: U17.5@275.792,9.821 277.079,9.821 277.653,9.247 277.653,7.747 278.755,6.645 C48.2@279.399,6.645
NetC49_1: C49.1 U17.6 | length 20
  Top Layer w0.4: v1(272.5,16.247) 273.653,15.095 v1(273.653,8.547)
  Bottom Layer w0.5: C49.1@263.403,15.797 263.425,15.819 263.853,16.247 v1@272.85,16.247 ; v1(273.653,8.547) 273.656,8.551 U17.6@275.792,8.551
NetC50_2: C50.2 U24.2 Y4.1 | length 11.3
  Top Layer w0.5: U24.2@131.425,88.925 131.425,81.833 Y4.1@132.9,80.358
  Bottom Layer w0.5: Y4.1@132.9,80.358 134.992,80.358 C50.2@135.013,80.343
NetC51_2: C51.2 U13.23 Y3.1 | length 8.9
  Top Layer w0.25: U13.23@118.216,82.705 119.479,81.442 Y3.1@124.7,81.442
  Bottom Layer w0.3: C51.2@124.647,83.347 124.7,83.294 Y3.1@124.7,81.442
NetC52_2: C52.2 U13.22 Y3.2 | length 11.6
  Top Layer w0.25: U13.22@117.862,82.352 121.464,78.75 122.9,78.75 124.7,76.95 Y3.2@124.7,76.442
  Bottom Layer w0.3: C52.2@124.7,74.4 Y3.2@124.7,76.442
NetC53_2: C53.2 U24.3 Y4.2 | length 5.8
  Top Layer w0.5: U24.3@132.695,88.925 132.695,85.563 Y4.2@132.9,85.358
  Bottom Layer w0.5: Y4.2@132.9,85.358 134.998,85.358 C53.2@135.013,85.343
NetC61_1: C61.1 C64.2 R12.2 R122.1 U2.6 | length 22.8
  Top Layer w0.5: U2.6@145,86.95 147.1,86.95 ; C61.1@147.85,81.95 147.1,82.7 v1(147.1,83.55) 147.1,86.95 ; C61.1@147.95,81.9 149.45,80.4 152.056,80.4 R12.2@153.563,81.907 ; R122.1@148.5,92.85 147.15,91.5 147.15,89.15 147.1,89.1 147.1,86.95
  Bottom Layer w0.5: v1(147.1,83.55) 147.1,82.7 147.85,81.95 147.997,81.95 C64.2@148,81.95
NetC61_2: C61.2 R12.1 R121.2 U2.2 | length 18.3
  Top Layer w0.5: R121.2@153.507,87.638 153.388,87.638 151.465,85.715 U2.2@150.2,85.715 148.365,85.715 148.1,85.45 148.1,84.25 150.4,81.95 150.65,81.95 150.7,81.9 150.7,81.903 150.7,81.95 150.703,81.953 152.15,83.4 155.3,83.4 156.3,82.4 156.3,81.907 R12.1@156.3,81.9
NetC62_2: C62.2 K2.3 R13.1 R121.1 | length 30
  Top Layer w0.5: R121.1@153.507,84.838 153.5,84.9 153.507,84.9 153.55,84.9 156.3,87.65 157.5,87.65 160.306,90.456 K2.3@160.306,92.24 ; R13.1@169.393,82.362 169.393,92.193 v1(169.45,92.25)
  Bottom Layer w0.5: K2.3@160.306,92.24 169.44,92.24 v1(169.45,92.25)
NetC63_2: C63.2 K2.1 R124.1 R125.1 | length 33
  Top Layer w0.5: R125.1@153.493,93.062 153.5,93.05 153.5,92.95 156.2,90.25 156.303,90.25 158.1,90.25 v1(158.3,90.45) ; v1(171,91.05) 171,83.556 R124.1@172.194,82.362
  Bottom Layer w0.5: v1(158.3,90.45) 160.8,90.45 161.4,91.05 v1(171,91.05) 174.116,91.05 K2.1@175.306,92.24
NetC66_1: C66.1 R125.2 R127.2 U2.3 | length 12.8
  Top Layer w0.4: R127.2@148.538,90.293 149.267,91.023 150.288,91.023 150.838,91.023 151.599,90.262 R125.2@153.493,90.262
  Top Layer w0.5: R127.2@149.1,90.35 149.1,90.3 148.815,90.016 148.2,89.4 148.2,87.7 148.915,86.985 U2.3@150.2,86.985
  Bottom Layer w0.5: C66.1@148.597,90.353 149.267,91.023 v1@150.238,91.023
  other v1: 150.288,91.123
NetC100_1: 
NetC100_2: 
NetC101_1: 
NetC102_1: 
NetC103_1: 
NetC103_2: 
NetC104_2: 
NetC105_2: 
NetC107_1: 
NetC107_2: 
NetC110_1: 
NetC111_1: 
NetC111_2: 
NetC114_1: 
NetC117_1: 
NetC300_2: 
NetC302_1: C302.1 C303.1 C304.1 C310.1 J301.8 X306.1 | length 64.4
  Top Layer w0.5: C310.1@61.265,81.721 61.265,81.766 61.265,83.171 v1(61.716,83.621) 62.216,84.121 66.467,84.121 ; C302.1@61.269,73.466 61.269,73.065 v1(62.316,72.018) ; J301.8@66.469,82.311 66.469,84.119 66.467,84.121 ; v1(68.217,65.016) 73.318,65.016 X306.1@74.569,63.766 ; v1(68.217,70.468) 69.117,71.368 69.918,71.368 71.842,73.293 71.968,73.418 C303.1@72.018,73.418 ; C303.1@71.669,73.466 74.966,73.466 74.969,73.469 74.969,83.171 74.019,84.121 71.668,84.121 ; C304.1@71.669,81.966 71.669,84.12 71.668,84.121 ; 66.467,84.121 71.668,84.121
  Bottom Layer w0.5: v1(61.716,83.621) 61.265,83.171 61.265,73.068 v1(62.316,72.018) ; v1(68.217,65.016) v1(68.217,70.468)
NetC302_2: C302.2 C303.2 C304.2 C310.2 J301.4 J301.5 J301.9 J301.12 R301.2 R302.1 R303.2 R304.1 X301.1 | length 76.7
  Top Layer w0.5: J301.9@52.669,71.556 52.669,69.462 54.864,67.267 63.266,67.267 64.616,68.617 ; C302.2@61.269,76.266 61.269,78.966 63.454,78.966 J301.5@63.919,78.501 65.189,77.231 J301.4@66.469,77.231 67.779,77.231 68.267,77.72 68.917,77.72 ; 64.566,68.617 64.616,68.617 ; 68.867,72.568 67.467,72.568 65.567,70.668 65.567,68.617 ; 68.917,72.568 68.917,77.72 ; C304.2@71.718,79.27 71.718,79.166 v1(71.718,77.72) ; C303.2@71.768,76.069 71.718,76.119 71.718,76.266 v1(71.718,77.72) ; X301.1@74.569,66.266 74.569,66.317 72.268,68.617 65.567,68.617 ; 64.616,68.617 65.567,68.617 ; 68.917,77.72 v1(71.718,77.72)
  Bottom Layer w0.5: J301.9@52.669,71.556 52.669,75.075 54.614,77.019 54.614,82.171 54.189,82.595 J301.12@54.189,84.176 ; R304.1@70.363,79.154 70.484,79.154 70.484,78.953 v1@71.693,77.745 ; R301.2@70.418,76.269 70.418,76.469 v1@71.693,77.745 ; v1(71.718,77.72) 73.076,76.362 R302.1@73.076,76.278 ; R303.2@73.076,79.178 73.076,79.127 v1@71.693,77.745
NetC500_1: C500.1 C504.2 C505.2 C511.2 C514.2 C515.2 C516.1 D508.1 D509.1 D512.2 D512.3 D512.6 D512.7 L500.3 pad.1 Q500.2 Q500.4 Q503.2 R500.1 R501.1 R506.1 R524.1 R525.2 R526.2 R527.2 R528.2 R529.2 U502.6 U503.3 | length 84.7
  Top Layer w0.5: C500.1@183.343,63.908 183.685,64.25 v1(185.45,64.25) ; D512.2@188.113,65.867 D512.7@188.113,71.067 ; D512.3@189.383,65.867 D512.6@189.383,71.067 ; v1(215.3,63.45) 216.019,62.731 U502.6@217.354,62.731 ; U503.3@216.85,54.8 C516.1@216.85,57.9 ; 216.85,56.35 218.55,56.35 v5(218.5,56.4) ; C516.1@216.85,57.76 C516.1@216.912,57.822
  Top Layer w0.6: v5(213.3,88.6) 213.292,88.592 213.292,84.208 213.748,83.752 Q503.2@213.748,82.802
  Top Layer w1: 188.35,68.35 192.3,68.35 193.818,69.868 Q500.4@202.1,69.868 ; R501.1@190.841,75.554 190.841,76.991 191.95,78.1 194.2,78.1 v4(194.65,78.55) v4(194.65,80.65) ; D509.1@191.804,80.881 197.478,80.881 D508.1@197.506,80.909 ; R524.1@201.807,56.592 R506.1@207.907,56.592 ; C514.2@204.843,56.558 204.843,52.622 L500.3@204.952,52.513
  Top Layer w1.5: R529.2@253.198,97.776 253.198,77.652 C515.2@253.357,77.492
  Bottom Layer w0.5: v5@218.397,56.4 v5(218.5,56.4)
  other v4: 192.497,68.5 199.697,69.9 253.198,79.5 253.198,83.55 253.198,87.6 253.198,91.7 253.198,95.75
NetC500_2: C500.2 D503.2 R519.1 | length 19.2
  Top Layer w0.5: C500.2@183.343,61.108 187.401,61.108 D503.2@188.038,60.471 D503.2@186.979,60.471 ; v1(196.05,64.35) 197.784,64.35 R519.1@197.893,64.459
  Bottom Layer w0.5: v1(185.97,61.48) 193.13,61.48 196,64.35 v1(196.05,64.35)
NetC501_1: C501.1 D511.8 R505.1 R507.2 | length 9.8
  Top Layer w0.5: R507.2@213.605,22.307 213.605,27.595 213.255,27.945 D511.8@213.255,29.45 215.7,29.45 C501.1@215.75,29.4
NetC501_2: C501.2 D511.1 R530.1 | length 8.7
  Top Layer w0.5: R530.1@213.6,39.293 213.6,36.6 213.3,36.3 213.3,33.45 214.658,32.092 C501.2@215.504,32.092
NetC503_1: C503.1 U500.5 U505.16 | length 18.2
  Top Layer w0.5: U500.5@183.29,18.932 183.29,21.457 U500.5@183.315,21.482 ; 183.29,20.25 187.15,20.25 187.5,20.6 187.5,24.55 189.512,26.562 189.512,29.445 U505.16@190.672,30.605
NetC503_2: C503.2 JP502.3 U500.4 U505.9 U505.15 | length 37.9
  Top Layer w0.5: JP502.3@184.65,29.54 186.985,31.875 192.65,31.875 193.45,31.075 193.45,29.294 192.312,28.157 192.312,26.312 190.4,24.4 190.4,20.3 190.45,20.25 193.29,20.25 ; 190.4,21 190.45,20.95 ; U505.9@190.672,39.495 192.605,39.495 193.35,38.75 193.35,32.875 192.35,31.875 ; U500.4@193.29,18.932 U500.4@193.29,21.482
NetC504_1: C504.1 C505.1 D502.2 R503.2 R520.2 U502.8 | length 63.7
  Top Layer w0.5: v5(195,50.35) 206.9,50.35 209.6,53.05 218.75,53.05 220.3,54.6 220.3,64.65 219.679,65.271 U502.8@217.354,65.271
  Top Layer w1: C505.1@184.477,57.081 184.485,57.073 C504.1@184.485,51.821 ; 184.485,55.35 184.505,55.37 D502.2@188.138,55.37 188.138,48.277 R520.2@188.258,48.157
  Bottom Layer w0.5: v5(188.15,49.6) 188.9,50.35 v5(195,50.35)
NetC505_1: 
NetC505_2: 
NetC506_2: C506.2 L500.5 U501.2 U501.3 U501.6 U501.7 | length 23
  Top Layer w0.88: L500.5@224.957,39.96 224.097,39.101 224.097,31.65 223.496,31.048 223.496,27.502 225.647,25.35 225.647,18.5 225.597,18.45
NetC507_2: C507.2 JP501.6 U501.1 | length 22.3
  Top Layer w0.6: C507.2@223.045,12.561 223.045,13.848 223.752,14.554 U501.1@223.752,18.555
  Bottom Layer w0.4: 231.297,4.2 231.297,6.25
  Bottom Layer w0.6: C507.2@223.045,12.561 223.047,10.6 224.597,9.55 228.097,9.55 231.247,6.4 ; JP501.6@230.029,2.561 231.297,3.829 231.297,4.2
NetC508_1: C508.1 C509.1 D510.2 L501.2 U503.1 | length 60.8
  Top Layer w0.5: U503.1@214.35,45.8 214.95,45.2 214.95,36.75 218.4,33.3 218.4,31.55 v1(218.75,31.2)
  Top Layer w2: L501.2@233.254,25.889 240.435,25.889 C508.1@241.518,24.806 ; C509.1@238.51,33.216 244.089,33.216 244.089,29.85 241.508,27.269 C508.1@241.508,24.792
  Bottom Layer w0.5: v1(218.75,31.2) 236.531,31.2 C509.1@238.489,33.158
NetC510_1: C510.1 D507.2 R518.2 | length 14.9
  Top Layer w1.2: R518.2@218.047,75.178 220.963,75.178 227.198,81.413 D507.2@227.198,84.627
NetC510_2: C510.2 C511.1 L500.1 R508.1 R509.2 R515.2 R518.1 | length 48.9
  Top Layer w1: R509.2@205.766,93.216 205.766,97.369 C511.1@207.797,99.4 ; 209.897,98.4 209.955,98.343 R515.2@209.955,93.215
  Top Layer w3: R508.1@198.954,106.579 199.621,106.579 203.75,102.45 204.747,102.45 208.797,98.4 212.606,98.4 219.234,91.771 226.959,91.771 L500.1@228.758,89.973
NetC511_1: 
NetC511_2: 
NetC512_1: C512.1 D512.1 Q501.1 R503.1 | length 50.3
  Top Layer w0.5: C512.1@184.254,67.11 185.496,65.867 D512.1@186.843,65.867 ; v1@186.9,68.65 v1(186.843,68.593) 186.843,64.107 187.65,63.3 189.85,63.3 190.432,62.718 190.75,62.4 190.75,51.465 R503.1@191.008,51.207 ; Q501.1@207.748,72.448 208.5,73.201 v1(208.5,74.45)
  Bottom Layer w0.5: v1(186.843,68.593) 186.843,69.143 187.65,69.95 189.65,69.95 193.35,73.65 207.7,73.65 v1(208.5,74.45)
NetC512_2: C512.2 D512.8 R501.2 R512.1 | length 18.2
  Top Layer w0.5: C512.2@184.254,69.91 185.411,71.067 D512.8@186.843,71.067
  Top Layer w1: R501.2@193.641,75.554 193.686,75.6 R512.1@197.097,75.6
  Bottom Layer w0.5: v1(185.6,71.067) 188.917,71.067 193.45,75.6 v1(195.4,75.6)
NetC513_1: C513.1 R502.1 R506.2 R513.2 U502.1 | length 16.8
  Top Layer w0.5: R502.1@206.808,64.457 208.607,64.457 209.421,65.271 U502.1@212.154,65.271 213.597,66.713 C513.1@213.597,67.71 213.612,67.725 R513.2@213.612,70.625 ; R506.2@207.907,59.392 207.907,62.257 208.25,62.6 208.25,64.457
NetC513_2: C513.2 C516.2 R513.1 U502.2 U503.4 | length 18.8
  Top Layer w0.5: U502.2@212.154,64.001 214.101,64.001 214.15,64.05 ; C516.2@214.112,57.822 214.112,55.038 U503.4@214.35,54.8 ; C516.2@214.195,57.905 214.15,57.95 214.15,65 216.4,67.25 216.4,70.613 R513.1@216.412,70.625
NetC514_1: C514.1 R517.1 R524.2 U502.3 | length 35.7
  Top Layer w0.5: R524.2@201.807,59.392 204.808,59.392 206.2,58 209.4,58 209.85,58.45 209.85,62.15 210.431,62.731 U502.3@212.154,62.731 ; C514.1@204.843,59.358 204.843,61.143 205.4,61.7 205.4,73.45 209.762,77.812 R517.1@209.955,77.812
NetC515_1: C515.1 R523.2 U502.4 | length 50.5
  Top Layer w0.5: v1(211.25,59.75) 212.154,60.654 U502.4@212.154,61.461 ; v1@248.242,74.708 253.342,74.708 C515.1@253.357,74.692
  Bottom Layer w0.5: v1(211.25,59.75) 219.9,59.75 219.975,59.825 234.9,74.75 v1(248.3,74.75)
NetC516_1: 
NetC516_2: 
NetC517_1: C517.1 JP501.1 U504.2 U504.4 | length 25.7
  Top Layer w1.2: U504.4@245.862,13.453 245.962,13.553 U504.2@252.214,13.553
  Top Layer w2: JP501.1@235.109,5.101 241.661,5.101 242.661,6.102 242.661,11.103 245.012,13.453 U504.4@245.862,13.453 ; 240.714,5.101 C517.1@242.222,3.593
NetC518_2: C518.2 U505.5 X502.1 | length 20
  Top Layer w0.5: U505.5@199.922,35.685 202.082,35.685 202.097,35.7 v1(202.197,35.7) ; v1(207.15,29.65) 207.15,28.144 C518.2@207.157,28.137
  Bottom Layer w0.5: v1(202.197,35.7) 205.509,39.012 206.685,39.012 208.05,37.647 208.05,30.55 v1(207.15,29.65)
NetC519_2: C519.2 R531.2 U505.7 | length 20.1
  Top Layer w0.5: v1(198.097,28.2) 197.15,29.147 197.15,36.95 198.425,38.225 U505.7@199.922,38.225 ; R531.2@201.807,28.137 C519.2@204.457,28.137
  Bottom Layer w0.5: v1(198.097,28.2) 198.197,28.1 v1(203.097,28.1)